# Altium PCB Plata_2.PcbDoc
Units mm, origin at the board's own origin, x right, y up, seen from the top; angles counter-clockwise.
Board outline 24 x 24.5 mm, 2 copper layers (Top Layer, Bottom Layer), stack 1.569 mm thick; 7 components, 4 nets, 16 pads, 0 vias.
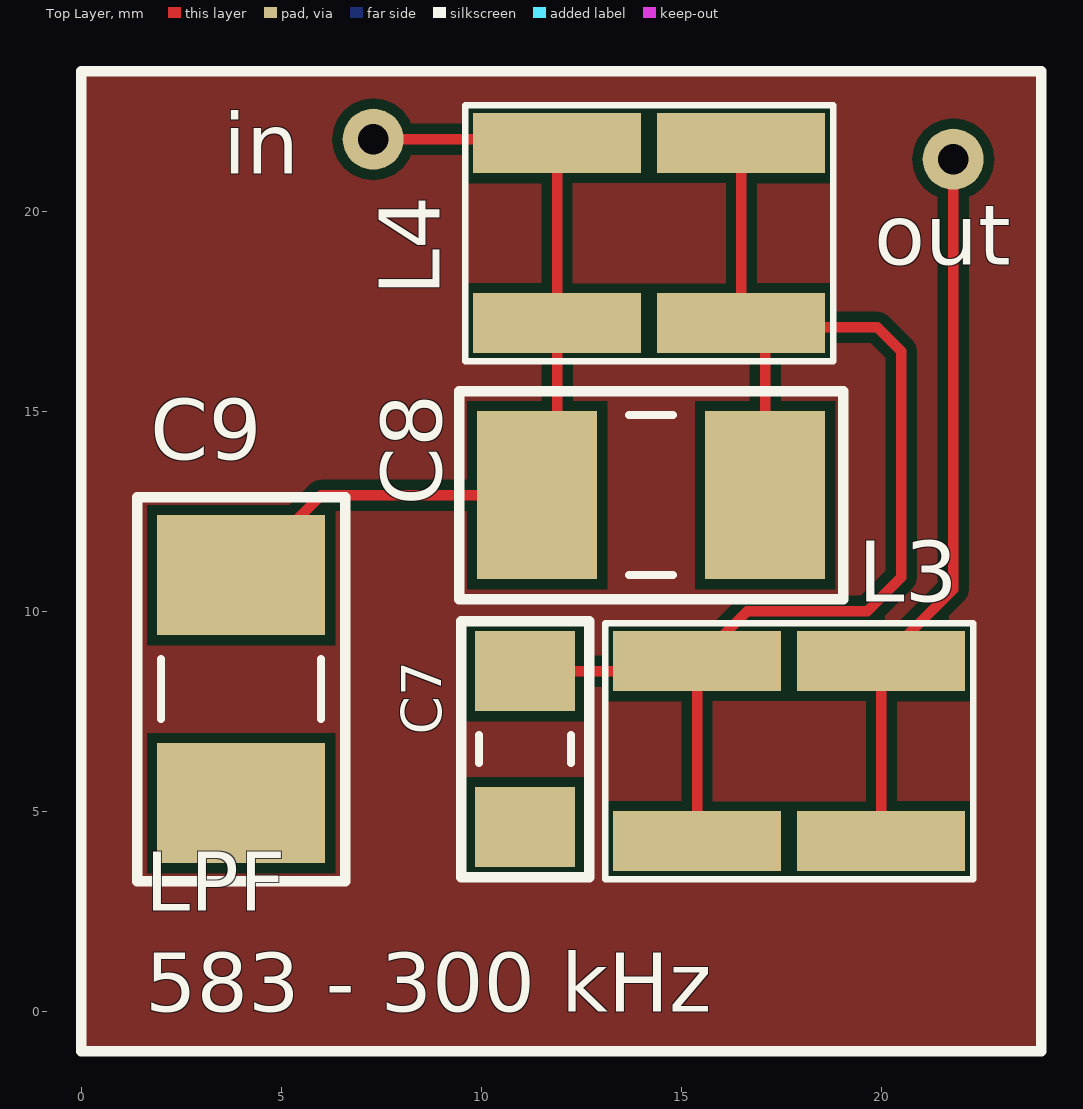
[diagram p0: Top Layer view]
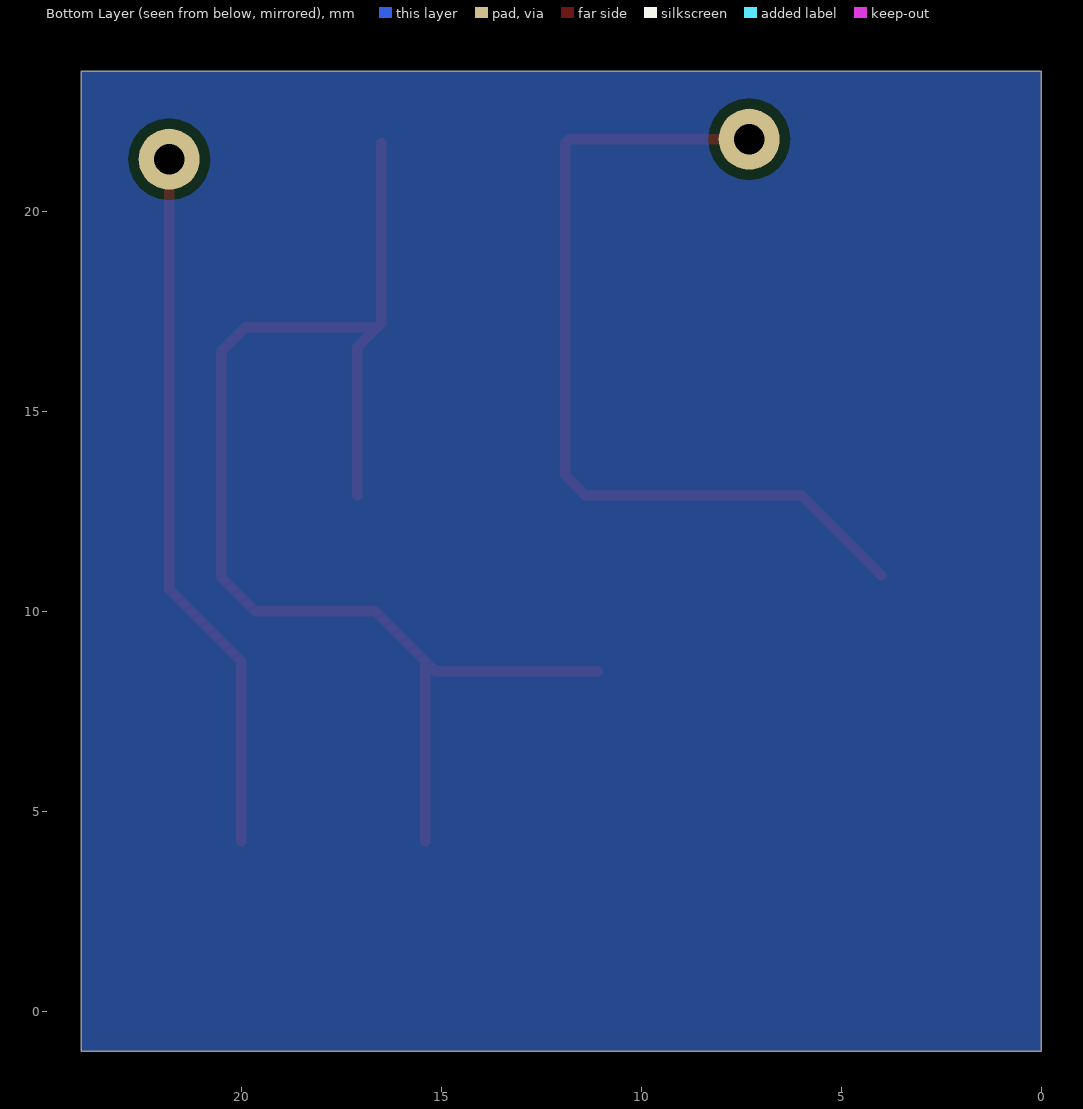
[diagram p1: Bottom Layer view, seen from below]

## Layer stack, top to bottom
Top Solder: solder mask 0.0254, SM-001, Dk 4
Top Layer: signal copper 0.035
Dielectric 1: core 1.4986, Core-043, Dk 4.3
Bottom Layer: signal copper 0.035
Bottom Solder: solder mask 0.0254, SM-001, Dk 4

## Board outline
0,-1 24,-1 24,23.5 0,23.5

## Design rules (kind name [scope] priority, off if disabled: settings)
Clearance [All] p1: gap=0.254 ignorepadtopadclearanceinfootprint=FALSE except(0: Arc-Hole Track-Hole SMDPad-Hole THPad-Hole Via-Hole Fill-Hole Poly-Hole Region-Hole Text-Hole)
PolygonConnect [All] p1: connectstyle=Relief reliefconductorwidth=0.254 reliefentries=4 polygonreliefangle="90 Angle" airgapwidth=0.254
RoutingVias [All] p1: holewidth=0.711 width=1.27 viastyle="Through Hole" minholewidth=0.711 minwidth=1.27 maxholewidth=0.711 maxwidth=1.27
SolderMaskExpansion [All] p1: expansion=0.102 istentingtop=FALSE
Width [All] p1: maxlimit=0.254 minlimit=0.254 preferedwidth=0.254
30 further rules are at their usual default settings.

## Classes and differential pairs
component class Sheet1: in out

## Components (designator, comment, footprint, x,y, rotation, side; value= is the part's Value field where it differs from the comment)
C7 "C7" C7(1206) 11.1,6.55 r270 top
C8 "C8" C8(1812) 14.25,12.9 r0 top
C9 "C9" C9(1812) 4,8.05 r270 top
in "Pin" Pin 7.3,21.8 r0 top (schematic designator Pin1)
L3 "L" L3,L4 17.7,6.5 r270 top
L4 "L" L3,L4 14.2,19.45 r270 top
out "Pin" Pin 21.8,21.3 r90 top (schematic designator Pin2)

## Footprints (in the part's own frame and the unit in brackets; to place one, negate y for a bottom-side part, rotate by r counter-clockwise, add the part's x,y. Pads: shape width x height; smd on the part's side, far side on the other; paste and mask are expansions set on the pad)
C7(1206) [mm] "Chip Capacitor, 2-Leads, Body 3,20x1,60mm, IPC Medium Density"
  rect 2x2.5 smd: 1(-1.95,0) 2(1.95,0)
  silkscreen extent -3.2,-1.6 3.2,1.6, body extent -1.7,-0.9 1.7,0.9, height 1.3
C8(1812) [mm] "Chip Capacitor, 2-Leads, Body 4,60x3,20mm, IPC Medium Density"
  rect 3x4.2 smd: 1(-2.85,0) 2(2.85,0)
  silkscreen extent -4.8,-2.6 4.8,2.6, body extent -2.55,-1.75 2.55,1.75, height 2.8
C9(1812) [mm] "Chip Capacitor, 2-Leads, Body 4,50x3,20mm, IPC Medium Density"
  rect 3x4.2 smd: 1(-2.85,0) 2(2.85,0)
  silkscreen extent -4.8,-2.6 4.8,2.6, body extent -2.4,-1.7 2.4,1.7, height 2.8
L3,L4 [mm]
  rect 1.5x4.2 smd: 1(-2.25,-2.3) 2(-2.25,2.3) 3(2.25,2.3) 4(2.25,-2.3)
  silkscreen extent -3.2,-4.6 3.2,4.6
Pin [mil]
  round 60 hole 30: 1(0,0)

## Nets (pads, with @x,y where several pads share a name; then routed paths per layer and width w, separated by ;. In a path a pad name is that pad's centre, name@x,y a point inside that pad or via, vN(x,y) a via of type N, cw(c..) or ccw(c..) an arc to the next point about the centre after c; other vN are vias at no path point)
GND: C7.2
NetC7_1: C7.1 C8.2 L3.1 L3.4 L4.2 L4.3 | length 33.7
  Top Layer w0.254: C7.1 15.15,8.5 L3.1 ; L3.4 L3.1 ; L4.2 L4.3 L4.3@16.6,17.1 ; C8.2 17.1,16.6 L4.3@16.6,17.1 ; L3.1 16.65,10 19.651,10 20.5,10.849 20.5,16.5 19.9,17.1 L4.3@16.6,17.1
NetC8_1: C8.1 C9.1 in.1 L4.1 L4.4 | length 21.9
  Top Layer w0.254: C9.1 6,12.9 C8.1 11.9,13.4 L4.4 L4.1 11.8,21.8 in.1
NetL3_2: L3.2 L3.3 out.1 | length 18.4
  Top Layer w0.254: L3.3 L3.2 21.8,10.55 out.1@21.8,21.9
pads on no net: C9.2

## Polygon pours and split planes (outlines as drawn)
no net on Top Overlay "GND_L02_P-001" (solid): 0,23.5
no net on Bottom Layer "NONET_L02_P001" (solid, pour order 1): 0,23.5 24,23.5 24,-1 0,-1
no net on Top Layer "NONET_L01_P000" (solid, pour order 0): 0,23.5 24,23.5 24,-1 0,-1

## Silkscreen, mask and mechanical layers (free items; w line width, h text height)
Top Overlay:
  the board outline again, w0.254
  text "LPF / 583 - 300 kHz" at 1.597,-0.5 h2.52